# Altium PCB P4_Communications.PcbDoc
Units mil, origin at the board's own origin, x right, y up, seen from the top; angles counter-clockwise.
Board outline 600 x 1000 mil, 2 copper layers (Top Layer, Bottom Layer); 5 components, 7 nets, 23 pads, 1 vias.
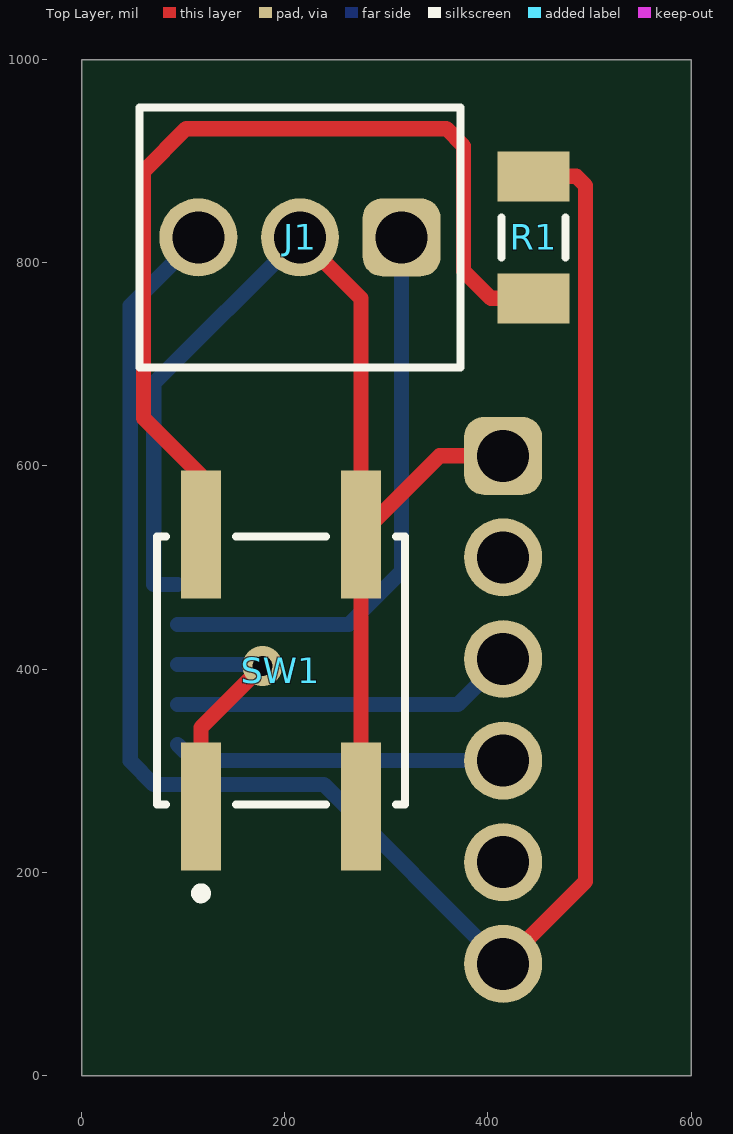
[diagram p0: Top Layer view]
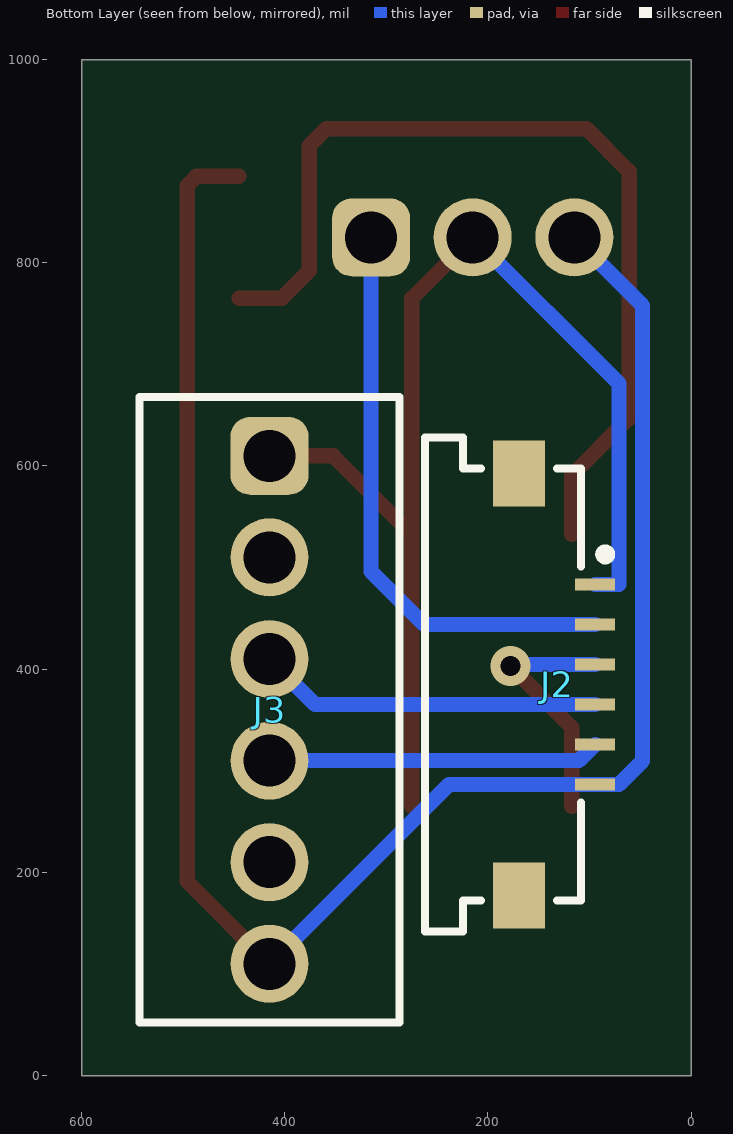
[diagram p1: Bottom Layer view, seen from below]

## Layer stack, top to bottom
Top Solder: solder mask 0.4, Solder Resist, Dk 3.5
Top Layer: signal copper 1.4
Dielectric 1: dielectric 12.6, FR-4, Dk 4.8
Bottom Layer: signal copper 1.4
Bottom Solder: solder mask 0.4, Solder Resist, Dk 3.5

## Board outline
0,0 600,0 600,1000 0,1000

## Design rules (kind name [scope] priority, off if disabled: settings)
BoardOutlineClearance [All] p1: gap=7.87 ignorepadtopadclearanceinfootprint=FALSE except(15.75: Arc-SplitBarrior Arc-SplitContinuation Track-SplitBarrior Track-SplitContinuation SMDPad-SplitBarrior SMDPad-SplitContinuation THPad-SplitBarrior THPad-SplitContinuation Via-SplitBarrior Via-SplitContinuation Fill-SplitBarrior Fill-SplitContinuation Poly-SplitBarrior Poly-SplitContinuation Region-SplitBarrior Region-SplitContinuation Text-SplitBarrior Text-SplitContinuation)
Clearance "Clearance Bottom Layer" [OnLayer('Bottom Layer')] p1: gap=8 ignorepadtopadclearanceinfootprint=TRUE except(10: Arc-Text Track-Text SMDPad-Text THPad-Text Via-Text Fill-Text Poly-Text Region-Text Text-Text)
Clearance "Clearance Top Layer" [OnLayer('Top Layer')] p2: gap=8 ignorepadtopadclearanceinfootprint=TRUE except(10: Arc-Text Track-Text SMDPad-Text THPad-Text Via-Text Fill-Text Poly-Text Region-Text Text-Text)
Clearance [All] p3: gap=7.87 ignorepadtopadclearanceinfootprint=FALSE except(3.5: Arc-Arc Arc-Track Arc-SMDPad Track-Track Track-SMDPad SMDPad-SMDPad; 5: Arc-Via Track-Via SMDPad-Via THPad-Via Via-Via; 10: Arc-Text Track-Text SMDPad-Text THPad-Text Via-Text Fill-Text Poly-Text Region-Text Text-Text)
HoleSize [All] p1: absolutevalues=TRUE maxlimit=248.03 minlimit=7.87 maxpercent=80.000 minpercent=20.000
MinimumAnnularRing [All] p1: minimumring=3
MinimumSolderMaskSliver [All] p1: minsoldermaskwidth=3.94
PolygonConnect PolygonConnect_1 [All] p1: thpad.connectstyle=Relief thpad.reliefconductorwidth=20 thpad.reliefentries=4 thpad.polygonreliefangle="90 Angle" thpad.airgapwidth=10 smdpad.connectstyle=Relief smdpad.reliefconductorwidth=20 smdpad.reliefentries=4 smdpad.polygonreliefangle="90 Angle" smdpad.airgapwidth=10 via.connectstyle=Direct via.reliefconductorwidth=20 via.reliefentries=4 via.polygonreliefangle="90 Angle" via.airgapwidth=10
RoutingCorners [All] p1: cornerstyle=Round minsetback=100 maxsetback=100
RoutingVias [All] p1: holewidth=19.68 width=39.37 viastyle="Through Hole" minholewidth=7.87 minwidth=17.72 maxholewidth=39.37 maxwidth=78.74
SilkToSilkClearance [All] p1: silktosilkclearance=3.94
SilkToSolderMaskClearance [IsPad] p1: minsilkscreentomaskgap=3.94 clearancetoexposedcopper=TRUE
SolderMaskExpansion [All] p1: expansion=4 istentingtop=FALSE
Width [All] p1: maxlimit=100 minlimit=3.5 preferedwidth=15
25 further rules are at their usual default settings.

## Components (designator, comment, footprint, x,y, rotation, side; value= is the part's Value field where it differs from the comment)
J1 "IR Comms" 691210910003 215,825 r180 top
J2 "" 686106183422 185,385 r270 bottom
J3 "691210910006" 691210910006 415,360 r270 bottom
R1 "10k" RESC3116X65X40ML10T20 445,825 r270 top
SW1 "EVQ-Q2U03W" FP-EVQQ2-MFG 196.26,398.86 r90 top

## Footprints (in the part's own frame and the unit in brackets; to place one, negate y for a bottom-side part, rotate by r counter-clockwise, add the part's x,y. Pads: shape width x height; smd on the part's side, far side on the other; paste and mask are expansions set on the pad)
686106183422 [mm] "ZIF Connectors, Horizontal, Top Contact Low Profile, pitch 1mm, 6p"
  rect 0.3x1 smd: 1(-2.5,2.3) 2(-1.5,2.3) 3(-0.5,2.3) 4(0.5,2.3) 5(1.5,2.3) 6(2.5,2.3)
  rect 1.65x1.3 smd: M1(-5.275,0.4) M2(5.275,0.4)
  silkscreen extent -6.17,-1.95 6.17,2.67, body extent -6.1,-1.9 6.1,2.35, height 1.28
691210910003 [mm] "2,54mm - modular - green - Horizontal wire entry - Cage clamp - 0,8mm2 wires - 03p"
  rrect50% 1.95x1.95 hole 1.3: 1(-2.54,0)
  round 1.95 hole 1.3: 2(0,0) 3(2.54,0)
  silkscreen extent -4.01,-3.25 4.01,3.25, body extent -4.01,-3.25 4.01,3.25, height 8.55
691210910006 [mm] "2,54mm - modular - green - Horizontal wire entry - Cage clamp - 0,8mm2 wires - 06p"
  rrect50% 1.95x1.95 hole 1.3: 1(-6.35,0)
  round 1.95 hole 1.3: 2(-3.81,0) 3(-1.27,0) 4(1.27,0) 5(3.81,0) 6(6.35,0)
  silkscreen extent -7.82,-3.25 7.82,3.25, body extent -7.82,-3.25 7.82,3.25, height 8.55
FP-EVQQ2-MFG [mm]
  rect 3.2x1 smd paste+0 mask+0: A(-3.4,2) A'(3.4,2) B(-3.4,-2) B'(3.4,-2)
  silkscreen extent -5.7,-3.1 3.35,3.1, body extent -5.1,-3.2 5.1,3.2, height 0.25
RESC3116X65X40ML10T20 [mm] "Chip Resistor, 2-Leads, Body 3.10x1.60mm, IPC Low Density"
  rect 1.25x1.8 smd: 1(-1.525,0) 2(1.525,0)
  silkscreen extent -0.5,-0.8 0.5,0.8, body extent -1.6,-0.85 1.6,0.85, height 0.65

## Part data
J1: library part CMP-1502-02457-2, "691210910003", NexarPartId=105950650
J2: library part CMP-1502-01493-2, "686106183422", Contact Resistance=30mΩ, Current Rating=800mA, Insulation Resistance=100MΩ, Max Operating Temperature=85°C, Min Operating Temperature=-25°C, Operating Supply Voltage=50V, Contact Plating=Tin, Gender=Receptacle, Lead Pitch=1mm, Length=7.1mm, NexarPartId=81848301, Number of Pins=6, Orientation=Horizontal, Packaging="Tape and Reel", Pitch=1mm, RoHS=Compliant
J3: library part CMP-1502-02460-2, NexarPartId=105950653
R1: library part CMP-2003-04020-1, "RC1206JR-1310KL", Manufacturer=Yageo, Part Number=RC1206JR-1310KL
SW1: library part CMP-05618-000012-1, "SWITCH TACTILE SPST-NO 0.02A 15V", Contact Current Rating=20mA, Contact Resistance=100mΩ, Manufacturer=Panasonic, Operating Force=2.6N, Package=EVQQ2, Temperature="-40°C to +85°C", Temperature Range High=+85°C, Temperature Range Low=-40°C, Voltage Rating Dc=15V, Automotive=No, Category=Switch, ComponentLink2Description=Datasheet, ComponentLink2URL=https://industrial.panasonic.com/cdbs/www-data/pdf/ATK0000/ATK0000C360.pdf, Device Class L1=Electromechanical, Device Class L2=Switches, Device Class L3="Tactile Switches", Digikey Description="SWITCH TACTILE SPST-NO 0.02A 15V", Electromechanical Life=200000Cycles, Height=3.3mm, Lead Free=Yes, Manufacturer Part Number=EVQ-Q2U03W, Mount="Surface Mount", Mouser Description="Tactile Switches 2.6NF 6.5x6.0x3.1mm", Octopart=https://octopart.com/evq-q2u03w-panasonic-1404553, RoHS=TRUE, Throw Configuration=SPST-NO

## Via types
v1: diameter 39.37, hole 19.68, Top Layer to Bottom Layer, 1 vias

## Nets (pads, with @x,y where several pads share a name; then routed paths per layer and width w, separated by ;. In a path a pad name is that pad's centre, name@x,y a point inside that pad or via, vN(x,y) a via of type N, cw(c..) or ccw(c..) an arc to the next point about the centre after c; other vN are vias at no path point)
GND_P4: J1.3 J2.6 J3.6 R1.1 | length 1847.2
  Top Layer w15: J3.6 496,191 496,876.04 487,885.04 R1.1
  Bottom Layer w15: J1.3 48,758 48,309.57 71,286.57 J2.6 238.43,286.57 J3.6
IR_Comms_P4: J1.1 J2.2 | length 571
  Bottom Layer w15: J2.2 263,444.06 315,496.06 J1.1
LoRa_Rx_P4: J2.4 J3.3 | length 339.1
  Bottom Layer w15: J2.4 370.31,365.31 J3.3
LoRa_Tx_P4: J2.5 J3.4 | length 327.2
  Bottom Layer w15: J2.5 110.39,310 J3.4
NetR1_2: R1.2 SW1.A' | length 923.3
  Top Layer w15: SW1.A' 117.52,590.48 61,647 61,890 103,932 359,932 376,915 376,792 403.04,764.96 R1.2
Send_P4: J2.3 SW1.A | length 247.3
  Top Layer w15: SW1.A 117.52,342.52 v1(178,403)
  Bottom Layer w15: J2.3 176.32,404.68 v1(178,403)
VCC_3.3V_P4: J1.2 J2.1 J3.1 SW1.B SW1.B' | length 1181.5
  Top Layer w15: J1.2 275,765 SW1.B' ; SW1.B SW1.B' ; J3.1 352.28,610 SW1.B'
  Bottom Layer w15: J2.1 71,483.43 71,681 J1.2
pads on no net: J2.M1 J2.M2 J3.2 J3.5